# Altium PCB WDpcb1u20171121t0900.PcbDoc
Units mm, origin at the board's own origin, x right, y up, seen from the top; angles counter-clockwise.
Board outline 152.4 x 101.6 mm, 2 copper layers (Top Layer, Bottom Layer); 26 components, 0 nets, 92 pads, 3 vias.
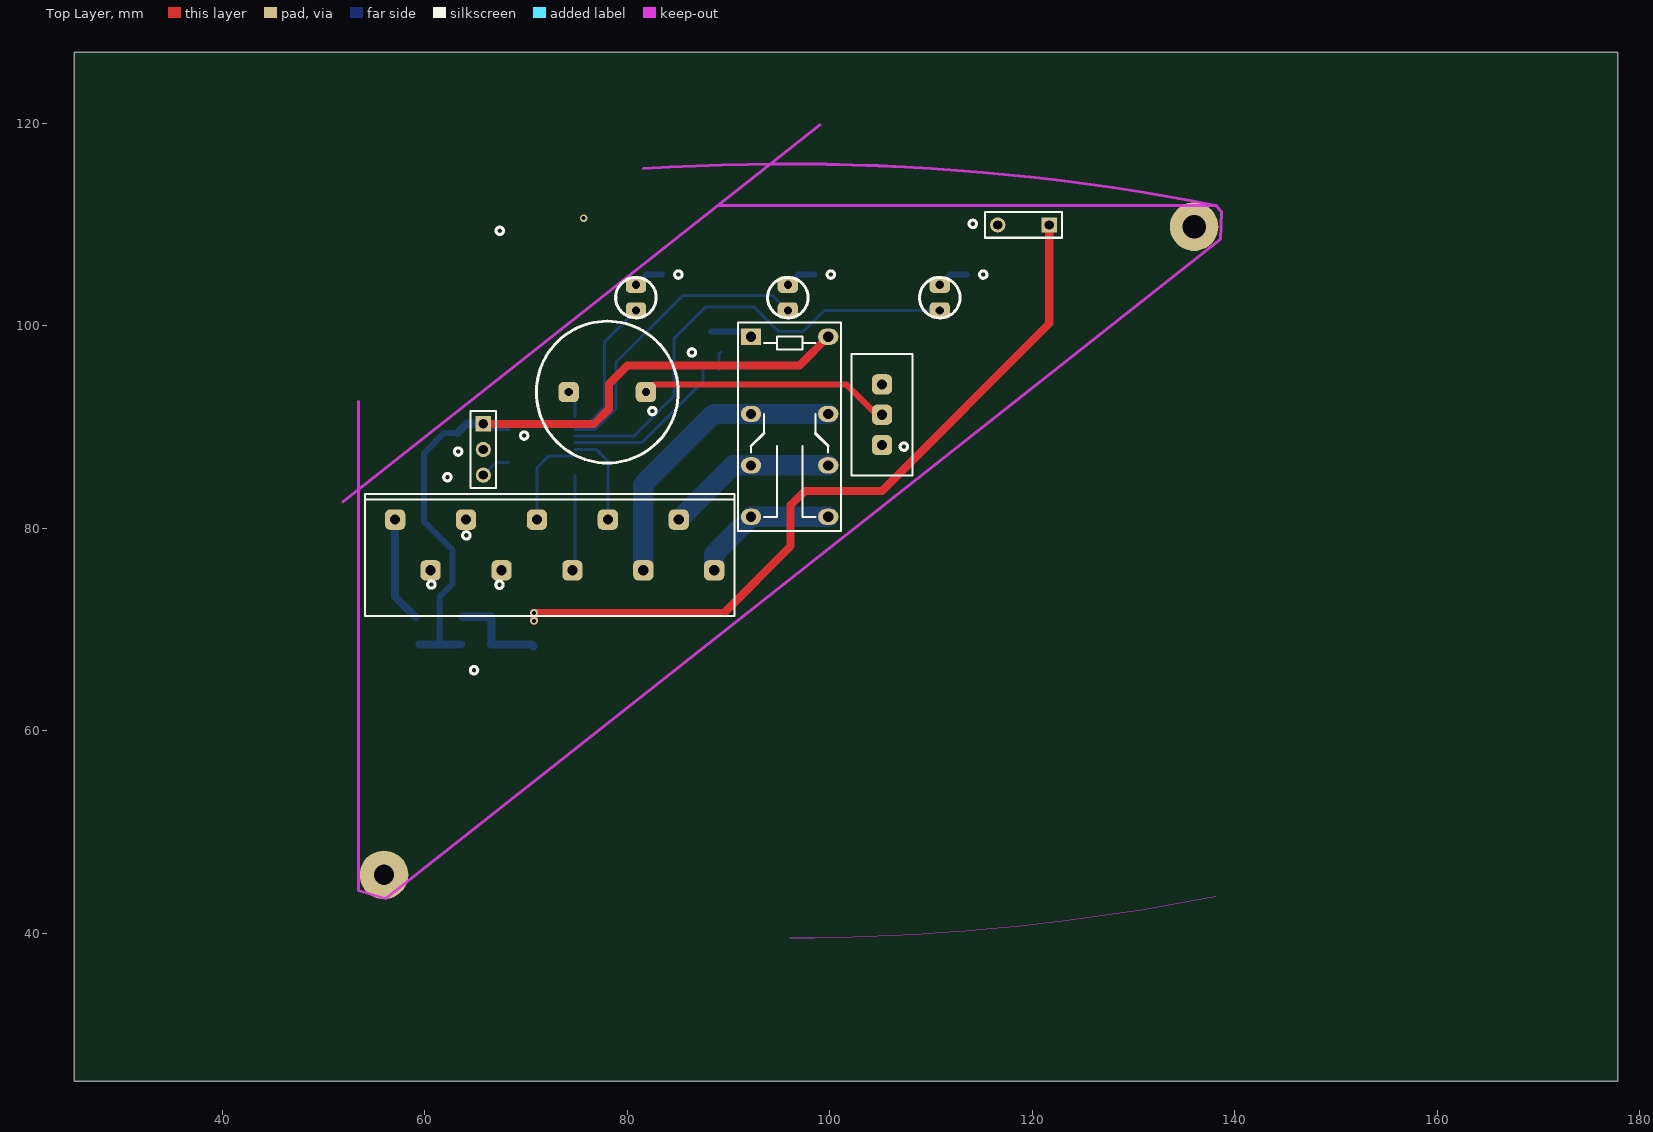
[diagram p0: Top Layer view]
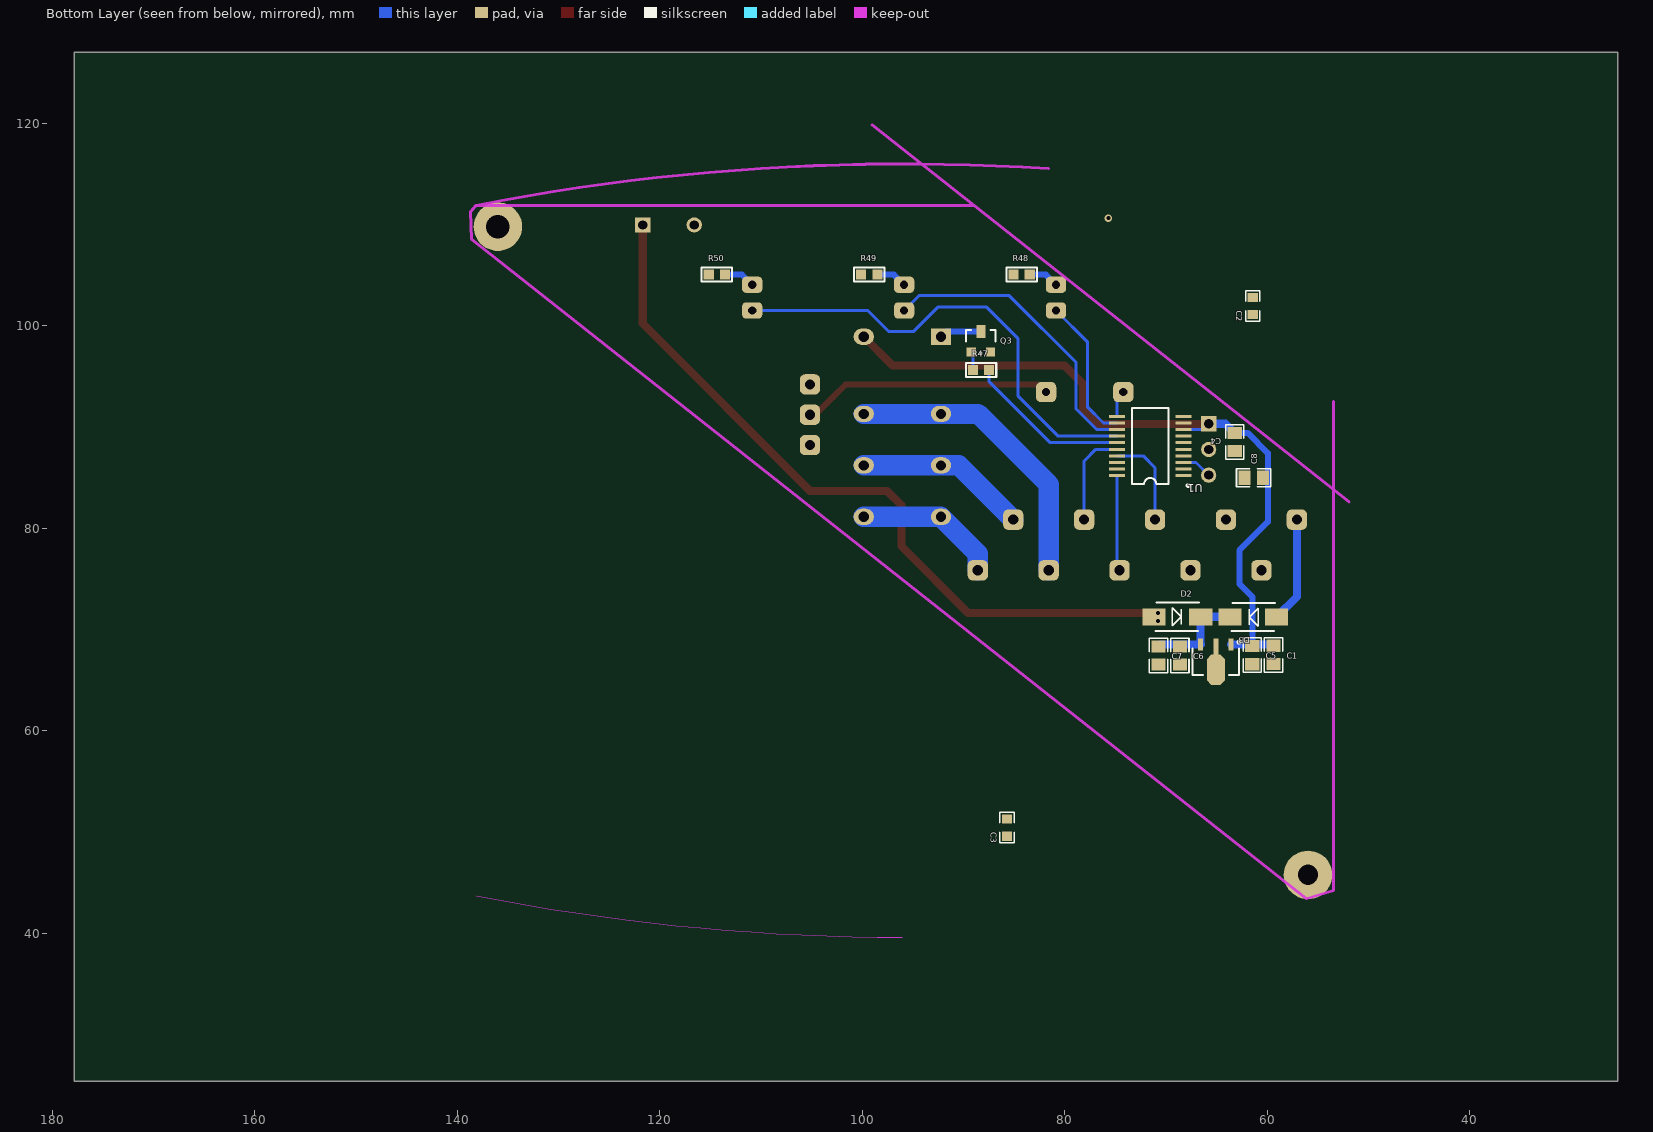
[diagram p1: Bottom Layer view, seen from below]

## Layer stack, top to bottom
Top Solder: solder mask 0.0102, Solder Resist, Dk 3.5
Top Layer: signal copper 0.0356
Dielectric 1: dielectric 0.32, FR-4, Dk 4.8
Bottom Layer: signal copper 0.0356
Bottom Solder: solder mask 0.0102, Solder Resist, Dk 3.5

## Board outline
25.4,25.4 177.8,25.4 177.8,127 25.4,127

## Design rules (kind name [scope] priority, off if disabled: settings)
Clearance [All] p1: gap=0.254
PolygonConnect [All] p1: connectstyle=Relief reliefconductorwidth=0.254 reliefentries=4 polygonreliefangle="90 Angle" airgapwidth=0.254
RoutingVias [All] p1: holewidth=0.711 width=1.27 viastyle="Through Hole" minholewidth=0.711 minwidth=1.27 maxholewidth=0.711 maxwidth=1.27
SolderMaskExpansion [All] p1: expansion=0.102
Width [All] p1: maxlimit=0.254 minlimit=0.254 preferedwidth=0.254
30 further rules are at their usual default settings.

## Components (designator, comment, footprint, x,y, rotation, side; value= is the part's Value field where it differs from the comment)
C1 "CAP110050456E" C0805-N 59.385,67.502 r90 bottom (schematic designator C55)
C2 "CAP110030718E" C0603-N 61.443,101.956 r90 bottom (schematic designator C52)
C3 "CAP110030718E" C0603-N 85.7,50.444 r90 bottom (schematic designator C52)
C4 "CAP110050456E" C0805-N 63.221,88.519 r270 bottom (schematic designator C55)
C5 "CAP110050456E" C0805-N 61.493,67.477 r90 bottom (schematic designator C55)
C6 "CAP110050456E" C0805-N 68.631,67.44 r90 bottom (schematic designator C55)
C7 "CAP110050456E" C0805-N 70.739,67.44 r90 bottom (schematic designator C55)
C8 "CAP110050456E" C0805-N 61.341,84.988 r0 bottom (schematic designator C55)
D2 "SMAJ33CA" DO-214AC(SMA) 68.885,71.261 r180 bottom (schematic designator D7)
D3 "SMAJ33CA" DO-214AC(SMA) 61.392,71.236 r0 bottom (schematic designator D7)
Q3 "TRS0BC817001" SOT-23 88.285,98.425 r180 bottom
R47 "330R" 0603 88.265,95.631 r180 bottom (schematic designator R1)
R48 "330R" 0603 84.252,105.054 r180 bottom (schematic designator R1)
R49 "330R" 0603 99.301,105.054 r180 bottom (schematic designator R1)
R50 "330R" 0603 114.351,105.054 r180 bottom (schematic designator R1)
U1 "Comment" TSSOP20 68.285,85.2 r90 bottom
? "Comment" HDR1X3#1 65.786,90.322 r270 top
? "Comment" "10 pin Terminal sping loaded" 57.085,80.85 r0 top
? "Comment" "relay 5v tetecom" 96.035,90.025 r180 top
? "Comment" "piezo buzzer" 78.029,93.447 r270 top
? "Comment" "Slide Switch" 105.156,91.211 r90 top
? "Comment" "led 3mm" 95.86,102.775 r270 top
? "Comment" "led 3mm" 110.86,102.775 r270 top
? "Comment" "led 3mm" 80.86,102.775 r270 top
? "Comment" SOT89L 65.075,66.816 r270 bottom
? "Comment" HDR1X3#2 121.666,109.957 r180 top

## Footprints (in the part's own frame and the unit in brackets; to place one, negate y for a bottom-side part, rotate by r counter-clockwise, add the part's x,y. Pads: shape width x height; smd on the part's side, far side on the other; paste and mask are expansions set on the pad)
"10 pin Terminal sping loaded" [mm] "degson"
  rrect50% 2x2 hole 1: 1(0,0) 2(3.5,-5) 3(7,0) 4(10.5,-5) 5(14,0) 6(17.5,-5) 7(21,0) 8(24.5,-5) 9(28,0) 10(31.5,-5)
  silkscreen extent -3,-9.5 33.5,2.54
0603 [mm]
  rect 1x1 smd: 1(0.8,0) 2(-0.8,0)
  silkscreen extent -1.5,-0.7 1.5,0.7
C0603-N [mm] "Chip Resistor, Body 1.6x0.8mm, IPC Medium Density"
  rect 0.9x1 smd: 1(-0.85,0) 2(0.85,0)
  silkscreen extent -1.5,-0.7 1.5,0.7, body extent -0.85,-0.48 0.85,0.48, height 0.95
C0805-N [mm] "Chip Resistor, Body 2.0x1.3mm, IPC Medium Density"
  rect 1.2x1.4 smd: 1(-0.9,0) 2(0.9,0)
  silkscreen extent -1.7,-0.9 1.7,0.9, body extent -1.07,-0.7 1.07,0.7, height 1.55
DO-214AC(SMA) [mm]
  rect 2.3x1.68 smd: A(-2.3,0) K(2.3,0)
  silkscreen extent -2.16,-1.4 2.16,1.4
HDR1X3#1 [mm] "Connector; Header; 3 Position"
  rect 1.5x1.5 hole 0.9: 1(0,0)
  round 1.5 hole 0.9: 2(2.54,0) 3(5.08,0)
  silkscreen extent -1.27,-1.27 6.35,1.27
HDR1X3#2 [mm] "Connector; Header; 3 Position"
  rect 1.5x1.5 hole 0.9: 1(0,0)
  round 0 all layers, no hole: 2(2.54,0)
  round 1.5 hole 0.9: 3(5.08,0)
  silkscreen extent -1.27,-1.27 6.35,1.27
"led 3mm" [mm]
  rrect50% 1.6x2 hole 0.8: 1(-1.27,0) 2(1.27,0)
  silkscreen extent -2,-2 2,2
"piezo buzzer" [mm]
  rrect50% 2x2 hole 0.8: 1(0,-3.81) 2(0,3.81)
  silkscreen extent -7,-7 7,7
"relay 5v tetecom" [mm]
  rect 2x1.6 hole 1: 1(3.81,-8.89)
  oval 2x1.6 hole 1: 4(3.81,-1.27) 6(3.81,3.81) 8(3.81,8.89) 9(-3.81,8.89) 11(-3.81,3.81) 13(-3.81,-1.27) 16(-3.81,-8.89)
  silkscreen extent -5.08,-10.3 5.08,10.3
"Slide Switch" [mm]
  rrect50% 2x2 hole 1: 1(-3,0) 2(0,0) 3(3,0)
  silkscreen extent -6,-3 6,3
SOT89L [mm] "SOT89, 3-Leads, Body 4.5x2.4 mm, Pitch 1.5mm, Lead Span 4.1mm, IPC High Density"
  oct 3x1.8 smd: 2(0.8,0)
  rect 1.6x0.5 smd: G(-1.5,0)
  rect 1.2x0.5 smd: I(-1.7,-1.5) O(-1.7,1.5)
  silkscreen extent -2.07,-2.3 1.3,2.42, body extent -1.3,-2.3 1.3,2.3, height 1.6
SOT-23 [mil]
  rect 36x36 smd: 1(-37.5,-40) 2(37.5,-40)
  rect 36x50 smd: 3(0.5,40)
  silkscreen extent -58,-45 58,45, body extent -60,-48 60,48, height 43
TSSOP20 [mm] "SO20 - 20 Leads; Body Width 7.5 mm; Pitch 1.27 mm"
  rect 0.3x1.6 smd: GND(3.9,0) NRST(1.95,0) PA2(2.6,0) PA3(3.25,0) PB0(5.85,0) PB1(5.85,6.55) PB2(5.2,6.55) PB3(4.55,6.55) PB4(3.9,6.55) PB5(3.25,6.55) PB6(2.6,6.55) PB7(1.95,6.55) PC4(0,6.55) PC5(0,0) PC6(0.65,0) PD0(5.2,0) SCL(0.65,6.55) SDA(1.3,6.55) SWIM(1.3,0) VCC(4.55,0)
  silkscreen extent -1.1,-0.6 6.67,5.07, body extent -0.39,0 6.2,6.5, height 1.4

## Part data
C1 C4 C5 C6 C7 C8: "CAP.0805 10uF 16V 10% X5R SAMSUNG"
C2 C3: "CAP.0603 100nF 50V 10% X7R SAMSUNG"
D2 D3: "DIODE TVS 400W 33V DO214AC SMA"
Q3: "TRANSISTOR NPN 0.5A 45V SOT23 NXP"
R47 R48 R49 R50: "RES SMD 330 OHM 5% 1/10W 0603"

## Free pads (board coordinates)
  round 4.8 hole 2: 0(55.977,45.777)
  round 4.8 hole 2.3: 0(135.977,109.777)

## Via types
v1: diameter 0.75, hole 0.4, Top Layer to Bottom Layer, tented both sides, 3 vias

## Nets (pads, with @x,y where several pads share a name; then routed paths per layer and width w, separated by ;. In a path a pad name is that pad's centre, name@x,y a point inside that pad or via, vN(x,y) a via of type N, cw(c..) or ccw(c..) an arc to the next point about the centre after c; other vN are vias at no path point)
pads on no net: ?.1 ?.2 ?.3 ?.4 ?.5 ?.6 ?.7 ?.8 ?.9 ?.10 ?.11 ?.13 ?.16 ?.G ?.I ?.O C1.1 C1.2 C2.1 C2.2 C3.1 C3.2 C4.1 C4.2 C5.1 C5.2 C6.1 C6.2 C7.1 C7.2 C8.1 C8.2 D2.A D2.K D3.A D3.K Q3.1 Q3.2 Q3.3 R47.1 R47.2 R48.1 R48.2 R49.1 R49.2 R50.1 R50.2 U1.GND U1.NRST U1.PA2 U1.PA3 U1.PB0 U1.PB1 U1.PB2 U1.PB3 U1.PB4 U1.PB5 U1.PB6 U1.PB7 U1.PC4 U1.PC5 U1.PC6 U1.PD0 U1.SCL U1.SDA U1.SWIM U1.VCC
copper on no net: | length 411.5
  Top Layer w0.6: 81.839,93.447 82.575,94.183 101.651,94.183 102.895,92.939 104.623,91.211 105.156,91.211
  Top Layer w0.8: 65.786,90.278 76.689,90.278 78.181,91.77 78.181,94.234 80.01,96.063 96.993,96.063 99.845,98.915 ; v1(70.79,70.866) v1(70.79,71.639) 89.546,71.639 96.139,78.232 96.139,82.296 97.536,83.693 105.156,83.693 121.666,100.203 121.666,109.957
  Bottom Layer w0.3: 65.55,89.75 68.285,89.75 ; 65.786,85.242 67.043,86.5 68.285,86.5 ; 71.085,80.85 71.085,85.975 72.26,87.15 74.835,87.15 ; 74.219,93.447 74.835,92.831 74.835,91.05 ; 74.585,75.85 74.835,76.1 74.835,85.2 ; 74.835,87.8 76.935,87.8 78.085,86.65 78.085,80.85 ; 74.835,88.45 81.435,88.45 87.465,94.48 87.465,95.631 ; 74.835,89.1 80.642,89.1 84.633,93.091 84.633,98.755 87.706,101.829 92.532,101.829 94.945,99.416 97.358,99.416 99.447,101.505 110.86,101.505 ; 74.835,89.75 76.847,89.75 78.867,91.77 78.867,96.368 85.471,102.972 93.912,102.972 94.393,102.972 95.86,101.505 ; 74.835,90.4 76.176,90.4 77.775,91.999 77.775,98.42 80.86,101.505 ; 89.065,95.631 89.065,97.237 89.237,97.409
  Bottom Layer w0.6: 61.468,68.516 61.468,73.228 62.763,74.524 62.763,77.826 59.944,80.645 59.944,87.427 61.936,89.419 63.221,89.419 ; 80.86,104.045 81.869,105.054 83.452,105.054 ; 88.272,99.441 91.699,99.441 92.225,98.915 ; 95.86,104.045 96.869,105.054 98.501,105.054 ; 110.86,104.045 111.869,105.054 113.551,105.054
  Bottom Layer w0.8: 57.085,80.85 57.085,73.243 59.092,71.236 ; 59.499,68.516 63.575,68.516 ; 63.221,89.419 64.124,90.322 65.786,90.322 ; 63.717,71.261 66.585,71.261 66.585,68.526 66.575,68.516 70.563,68.516 70.739,68.34
  Bottom Layer w2: 81.585,75.85 81.585,84.325 88.555,91.295 92.225,91.295 99.845,91.295 ; 85.085,80.85 90.45,86.215 92.225,86.215 99.845,86.215 ; 88.585,75.85 88.585,77.495 92.225,81.135 99.845,81.135
  other v1: 75.692,110.617

## Keep-outs
Keep-Out Layer:
  lines w0.013: 96.027,39.577 ccw(c95.977,258.677) 138.109,43.666
  lines w0.3: 51.949,82.605 99.047,119.823 ; 53.46,92.53 53.46,44.25 56.142,43.422 138.56,108.55 138.677,111.261 138.109,111.888 ; 81.621,115.506 cw(c95.977,-103.123) 138.109,111.888 ; 88.988,111.888 138.109,111.888

## Silkscreen, mask and mechanical layers (free items; w line width, h text height)
Top Overlay:
  circle w0.3: c114.12,110.061 r0.369
  circle w0.3: c69.823,89.156 r0.369
  circle w0.3: c62.239,85.042 r0.369
  circle w0.3: c67.41,109.375 r0.369
  circle w0.3: c60.66,74.45 r0.369
  circle w0.3: c67.385,74.425 r0.369
  circle w0.3: c64.11,79.3 r0.369
  circle w0.3: c63.297,87.579 r0.369
  circle w0.3: c107.315,88.062 r0.369
  circle w0.3: c82.485,91.575 r0.369
  circle w0.3: c86.383,97.361 r0.369
  circle w0.3: c85.052,105.054 r0.369
  circle w0.3: c100.101,105.054 r0.369
  circle w0.3: c115.151,105.054 r0.369
  circle w0.3: c64.872,65.989 r0.369